# EAGLE board CN-Cape005 (EAGLE 7.2.0)
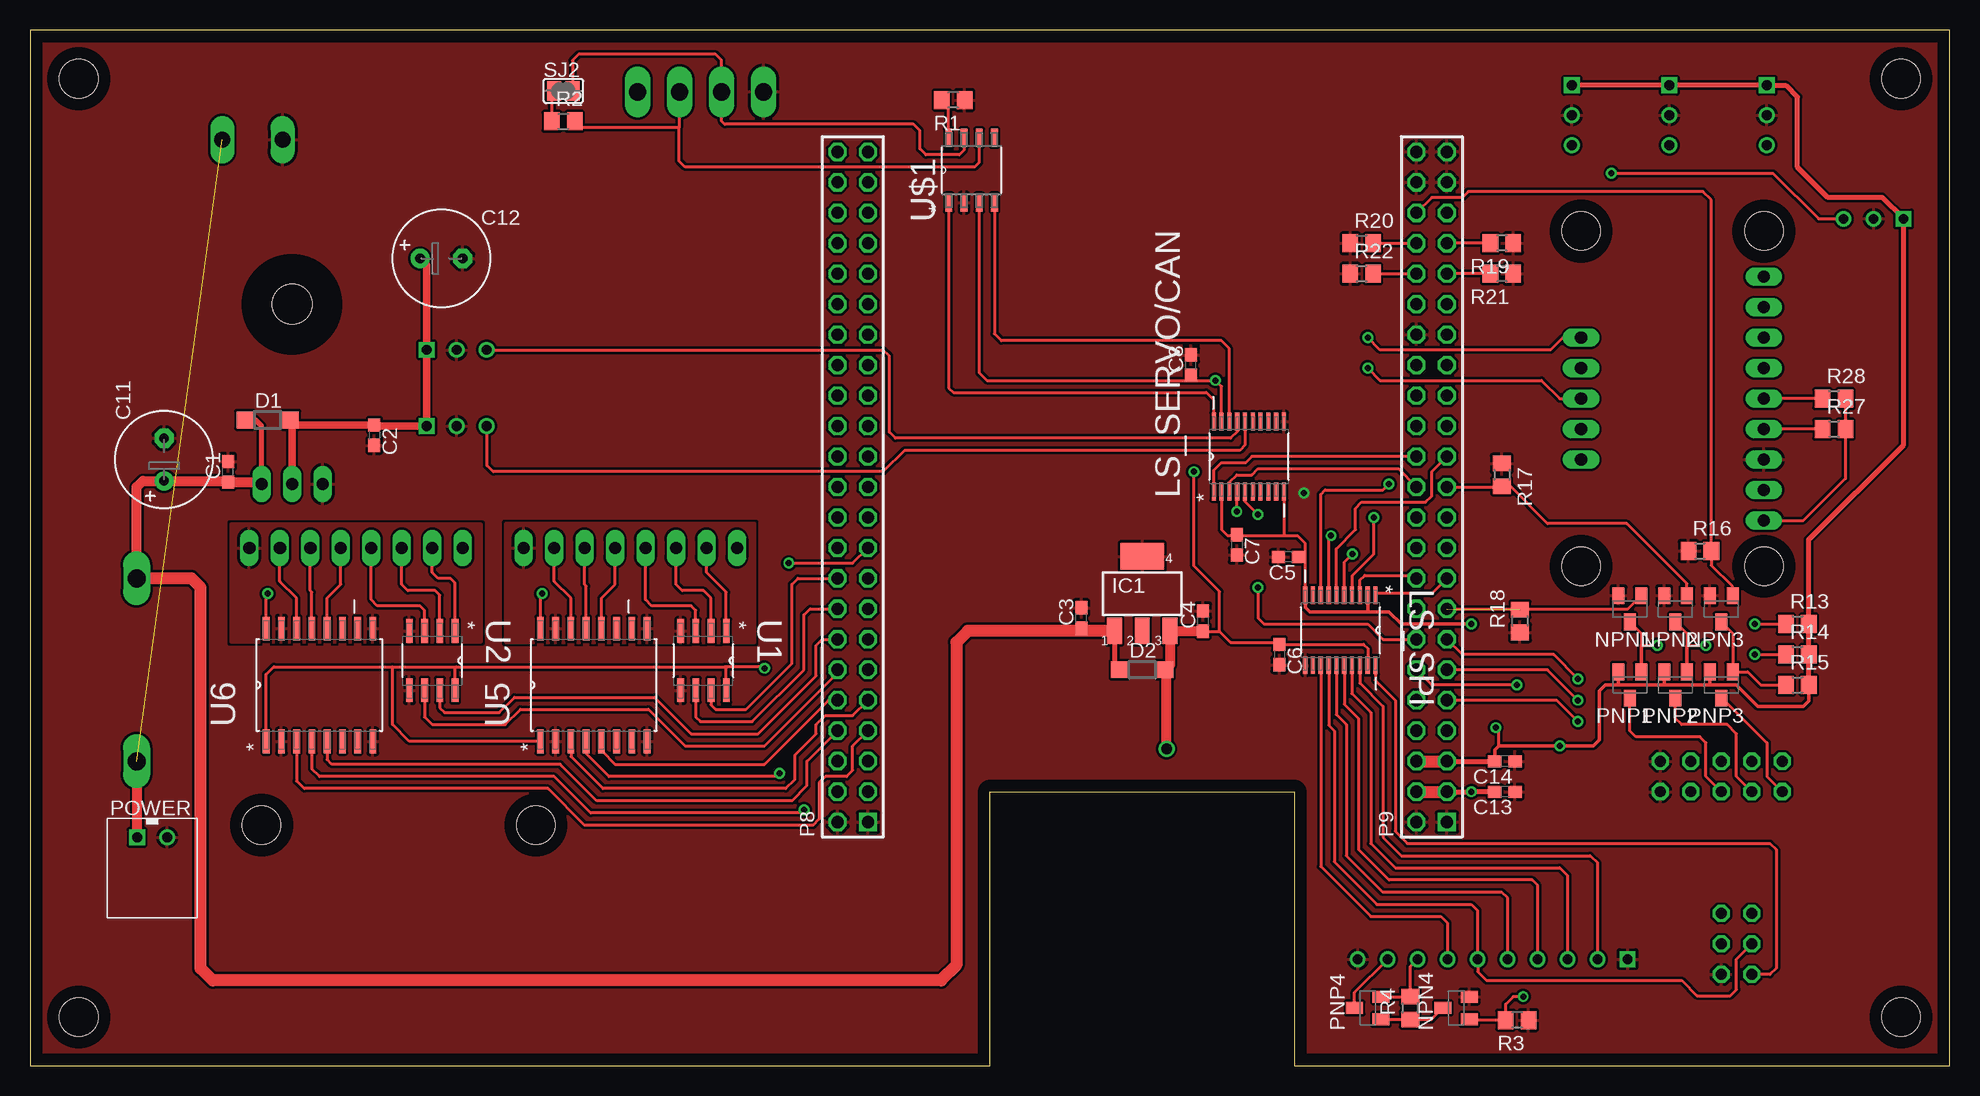
[diagram p0: board, top side]
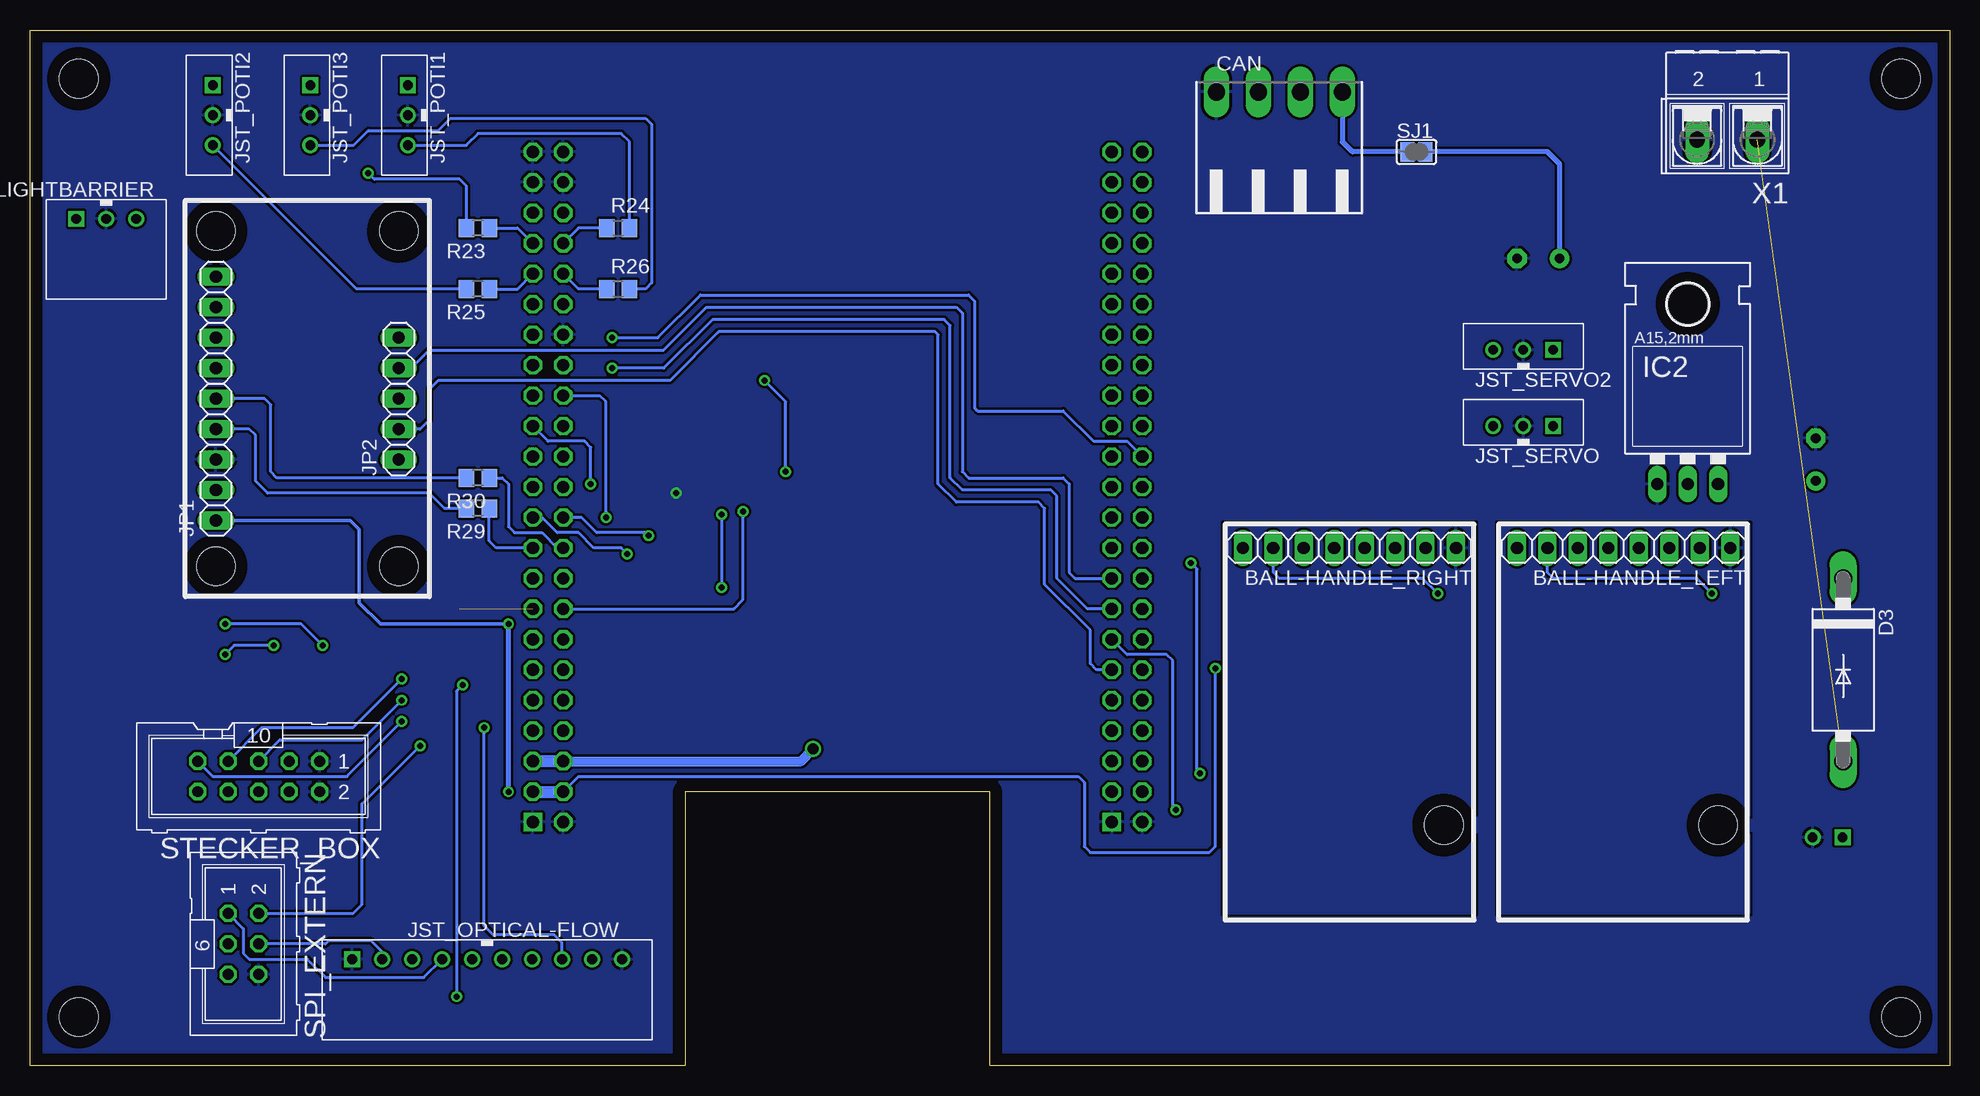
[diagram p1: board, bottom side, seen from below]

Size 160.02 x 86.36 mm. Coordinates in mm from the lower left corner, seen from the top.
Outline: 0,0 80.01,0 80.01,22.86 105.41,22.86 105.41,0 160.02,0 160.02,86.36 0,86.36 0,0
Copper layers (1*16): Top 0.035mm / dielectric 1.5mm / Bottom 0.035mm
Design rules "default *": minimum track width 10mil, minimum drill 24mil, track to track 8mil, track to pad 8mil, pad to pad 8mil, via to via 8mil, smd to smd 8mil, copper to edge 40mil, drill to drill 8mil, minimum pad ring 10mil, minimum via ring 8mil, stop-mask expansion 4mil, vias tented up to drill 0mil, thermal gap 10mil
Holes 3.2 mm at 129.29,69.6 144.53,69.6 129.29,41.66 144.53,41.66 4.06,4.06 155.96,4.06 155.96,82.3 4.06,82.3 19.3,20.07 42.16,20.07

## Footprints (pad centres in the part's own frame; a part is rotated, then mirrored left to right if it is on the bottom)
1X08 = drill 1.016 long: 1 -8.89,0; 2 -6.35,0; 3 -3.81,0; 4 -1.27,0; 5 1.27,0; 6 3.81,0; 7 6.35,0; 8 8.89,0
C0603 = smd 1.1 x 1: 1 -0.85,0; 2 0.85,0
E3,5-8 = drill 0.813 pad 1.6: + -1.778,0 | drill 0.813 pad 1.6 octagon: - 1.778,0
90-4 = drill 1.422 long: 1 -5.25,5.25; 2 -1.75,5.25; 3 1.75,5.25; 4 5.25,5.25
SOD123 = smd 1.4 x 1.4: A 1.9,0; C -1.9,0
DO27-15 = drill 1.499 long: A 7.62,0; C -7.62,0
SOT223 = smd 1.219 x 2.235: 1 -2.311,-3.099; 2 0,-3.099; 3 2.311,-3.099 | smd 3.6 x 2.2: 4 0,3.099
TO220L1 = drill 1.016 long: 1 -2.54,-3.81; 2 0,-3.81; 3 2.54,-3.81 | hole 3.302: 0,11.176
1X09 = drill 1.016 long: 1 -10.16,0; 2 -7.62,0; 3 -5.08,0; 4 -2.54,0; 5 0,0; 6 2.54,0; 7 5.08,0; 8 7.62,0; 9 10.16,0
1X05 = drill 1.016 long: 1 -5.08,0; 2 -2.54,0; 3 0,0; 4 2.54,0; 5 5.08,0
S3B-EH = drill 0.813 square: 1 2.5,0 | drill 0.813: 2 0,0; 3 -2.5,0
S10B-EH = drill 0.813 square: 1 11.25,0 | drill 0.813: 2 8.75,0; 3 6.25,0; 4 3.75,0; 5 1.25,0; 6 -1.25,0; 7 -3.75,0; 8 -6.25,0; 9 -8.75,0; 10 -11.25,0
B3B-EH = drill 0.813 square: 1 2.5,0 | drill 0.813: 2 0,0; 3 -2.5,0
SOP65P640X120-20N = smd 1.473 x 0.356: 1 -2.921,2.921; 2 -2.921,2.286; 3 -2.921,1.626; 4 -2.921,0.965; 5 -2.921,0.33; 6 -2.921,-0.33; 7 -2.921,-0.965; 8 -2.921,-1.626; 9 -2.921,-2.286; 10 -2.921,-2.921; 11 2.921,-2.921; 12 2.921,-2.286; 13 2.921,-1.626; 14 2.921,-0.965; 15 2.921,-0.33; 16 2.921,0.33; 17 2.921,0.965; 18 2.921,1.626; 19 2.921,2.286; 20 2.921,2.921
SOT23-BEC = smd 1 x 1.4: B -0.95,-1.1; C 0,1.1; E 0.95,-1.1
2X23 = drill 1.016 square: 1 -26.67,-1.27 | drill 1.016 octagon: 2 -26.67,1.27; 3 -24.13,-1.27; 4 -24.13,1.27; 5 -21.59,-1.27; 6 -21.59,1.27; 7 -19.05,-1.27; 8 -19.05,1.27; 9 -16.51,-1.27; 10 -16.51,1.27; 11 -13.97,-1.27; 12 -13.97,1.27; 13 -11.43,-1.27; 14 -11.43,1.27; 15 -8.89,-1.27; 16 -8.89,1.27; 17 -6.35,-1.27; 18 -6.35,1.27; 19 -3.81,-1.27; 20 -3.81,1.27; 21 -1.27,-1.27; 22 -1.27,1.27; 23 1.27,-1.27; 24 1.27,1.27; 25 3.81,-1.27; 26 3.81,1.27; 27 6.35,-1.27; 28 6.35,1.27; 29 8.89,-1.27; 30 8.89,1.27; 31 11.43,-1.27; 32 11.43,1.27; 33 13.97,-1.27; 34 13.97,1.27; 35 16.51,-1.27; 36 16.51,1.27; 37 19.05,-1.27; 38 19.05,1.27; 39 21.59,-1.27; 40 21.59,1.27; 41 24.13,-1.27; 42 24.13,1.27; 43 26.67,-1.27; 44 26.67,1.27; 45 29.21,-1.27; 46 29.21,1.27
S2B-EH = drill 0.813 square: 1 2.5,0 | drill 0.813: 2 0,0
R0805 = smd 1.3 x 1.5: 1 -0.95,0; 2 0.95,0
SJ = smd 1.168 x 1.6: 1 -0.762,0; 2 0.762,0
ML6 = drill 0.914 octagon: 1 -2.54,-1.27; 2 -2.54,1.27; 3 0,-1.27; 4 0,1.27; 5 2.54,-1.27; 6 2.54,1.27
ML10 = drill 0.914 octagon: 1 -5.08,-1.27; 2 -5.08,1.27; 3 -2.54,-1.27; 4 -2.54,1.27; 5 0,-1.27; 6 0,1.27; 7 2.54,-1.27; 8 2.54,1.27; 9 5.08,-1.27; 10 5.08,1.27
SOIC127P600X175-8N = smd 1.981 x 0.559: 1 -2.464,1.905; 2 -2.464,0.635; 3 -2.464,-0.635; 4 -2.464,-1.905; 5 2.464,-1.905; 6 2.464,-0.635; 7 2.464,0.635; 8 2.464,1.905
SOIC127P1032X265-16N = smd 1.981 x 0.559: 1 -4.699,4.445; 2 -4.699,3.175; 3 -4.699,1.905; 4 -4.699,0.635; 5 -4.699,-0.635; 6 -4.699,-1.905; 7 -4.699,-3.175; 8 -4.699,-4.445; 9 4.699,-4.445; 10 4.699,-3.175; 11 4.699,-1.905; 12 4.699,-0.635; 13 4.699,0.635; 14 4.699,1.905; 15 4.699,3.175; 16 4.699,4.445
SOIC127P600X175-8N' = smd 1.473 x 0.559: 1 -2.718,1.905; 2 -2.718,0.635; 3 -2.718,-0.635; 4 -2.718,-1.905; 5 2.718,-1.905; 6 2.718,-0.635; 7 2.718,0.635; 8 2.718,1.905
AK500/2-H = drill 1.321 long: 1 -2.515,0; 2 2.515,0

## Placement (x,y rotation side)
BALL-HANDLE_LEFT  [1X08]  27.18,43.18 180 bottom
BALL-HANDLE_RIGHT  [1X08]  50.04,43.18 180 bottom
C1  100nF  [C0603]  16.51,49.53 90 top
C2  100nF  [C0603]  28.7,52.58 270 top
C3  100nF  [C0603]  87.63,37.34 90 top
C4  100nF  [C0603]  97.79,37.08 90 top
C5  100nF  [C0603]  104.9,42.42 180 top
C6  100nF  [C0603]  104.14,34.29 270 top
C7  100nF  [C0603]  100.58,43.43 270 top
C8  100nF  [C0603]  96.77,58.42 90 top
C11  220µF  [E3,5-8]  11.18,50.55 90 top
C12  220µF  [E3,5-8]  34.29,67.31 0 top
C13  100nF  [C0603]  122.94,22.86 180 top
C14  100nF  [C0603]  122.94,25.4 180 top
CAN  [90-4]  55.88,75.95 0 bottom
D1  [SOD123]  19.81,53.85 0 top
D2  [SOD123]  92.71,33.02 0 top
D3  BY550  [DO27-15]  8.89,33.02 270 bottom
IC1  LM340MP-05  [SOT223]  92.71,39.37 0 top
IC2  [TO220L1]  21.84,52.32 0 bottom
JP1  [1X09]  144.53,55.63 90 bottom
JP2  [1X05]  129.29,55.63 90 bottom
JST_LIGHTBARRIER  S3PIN  [S3B-EH]  153.67,70.61 180 bottom
JST_OPTICAL-FLOW  S10PIN  [S10B-EH]  121.92,8.89 180 bottom
JST_POTI1  3PIN  [B3B-EH]  128.52,79.25 90 bottom
JST_POTI2  3PIN  [B3B-EH]  144.78,79.25 90 bottom
JST_POTI3  3PIN  [B3B-EH]  136.65,79.25 90 bottom
JST_SERVO  3PIN  [B3B-EH]  35.56,53.34 0 bottom
JST_SERVO2  3PIN  [B3B-EH]  35.56,59.69 0 bottom
LS_SERVO/CAN  TXB0108PWR  [SOP65P640X120-20N]  101.6,50.8 90 top
LS_SPI  TXB0108PWR  [SOP65P640X120-20N]  109.22,36.32 270 top
NPN1  BC849SMD  [SOT23-BEC]  133.35,38.1 180 top
NPN2  BC849SMD  [SOT23-BEC]  137.16,38.1 180 top
NPN3  BC849SMD  [SOT23-BEC]  140.97,38.1 180 top
NPN4  BC849SMD  [SOT23-BEC]  118.87,4.83 90 top
P8  PINHD-2X23  [2X23]  68.58,46.99 90 top
P9  PINHD-2X23  [2X23]  116.84,46.99 90 top
PNP1  BC858BSMD  [SOT23-BEC]  133.35,31.75 180 top
PNP2  BC858BSMD  [SOT23-BEC]  137.16,31.75 180 top
PNP3  BC858BSMD  [SOT23-BEC]  140.97,31.75 180 top
PNP4  BC858BSMD  [SOT23-BEC]  111.51,4.83 90 top
POWER  S2PIN  [S2B-EH]  11.43,19.05 180 top
R1  1k  [R0805]  76.96,80.52 180 top
R2  120  [R0805]  44.45,78.74 0 top
R3  10k  [R0805]  123.95,3.81 180 top
R4  10k  [R0805]  115.06,4.83 90 top
R13  10k  [R0805]  147.32,36.83 0 top
R14  10k  [R0805]  147.32,34.29 0 top
R15  10k  [R0805]  147.32,31.75 0 top
R16  10k  [R0805]  139.19,42.93 0 top
R17  10k  [R0805]  122.68,49.28 270 top
R18  10k  [R0805]  124.21,37.08 90 top
R19  1k  [R0805]  122.68,68.58 180 top
R20  1k  [R0805]  111,68.58 0 top
R21  1k  [R0805]  122.68,66.04 180 top
R22  1k  [R0805]  111,66.04 0 top
R23  1,8k  [R0805]  122.68,69.85 180 bottom
R24  1,8k  [R0805]  111,69.85 0 bottom
R25  1,8k  [R0805]  122.68,64.77 180 bottom
R26  1,8k  [R0805]  111,64.77 0 bottom
R27  10k  [R0805]  150.37,53.09 0 top
R28  10k  [R0805]  150.37,55.63 0 top
R29  330  [R0805]  122.68,46.48 180 bottom
R30  330  [R0805]  122.68,49.02 180 bottom
SJ1  [SJ]  44.45,76.2 0 bottom
SJ2  [SJ]  44.45,81.28 0 top
SPI_EXTERN  [ML6]  142.24,10.16 270 bottom
STECKER_BOX  [ML10]  140.97,24.13 180 bottom
U1  ADUM1200ARZ  [SOIC127P600X175-8N]  56.13,33.78 270 top
U2  ADUM1200ARZ  [SOIC127P600X175-8N]  33.53,33.78 270 top
U5  ADUM1300ARWZ  [SOIC127P1032X265-16N]  46.99,31.75 90 top
U6  ADUM1300ARWZ  [SOIC127P1032X265-16N]  24.13,31.75 90 top
U$1  MCP2551-I/SN  [SOIC127P600X175-8N']  78.49,74.68 90 top
X1  [AK500/2-H]  18.54,77.22 180 bottom

## Library data of the parts
BALL-HANDLE_LEFT BALL-HANDLE_RIGHT JP1 JP2 = pinhead
C1-C8 C11-C14 R1-R4 R13-R30 = rcl
CAN = con-weidmueller-sl35
D1 D2 = diode; REICHELT: SD 101BW
D3 = diode
IC1 = linear
IC2 = v-reg
JST_LIGHTBARRIER JST_OPTICAL-FLOW JST_POTI1-JST_POTI3 JST_SERVO JST_SERVO2 POWER = jst_eh
LS_SERVO/CAN LS_SPI = TI-TXB0108PWR; MPN: TXB0108PWR; OC_FARNELL: 1494945; OC_NEWARK: 27M1151; PACKAGE: TSSOP-20; SUPPLIER: Texas Instruments
NPN1-NPN4 = transistor-npn
P8 P9 = pinhead-2x23
PNP1-PNP4 = transistor-pnp
SJ1 SJ2 = jumper
SPI_EXTERN STECKER_BOX = con-ml
U1 U2 = ADUM1200; MPN: ADUM1200ARZ; OC_FARNELL: 1078204; OC_NEWARK: 19M0750; PACKAGE: SOIC-8; SUPPLIER: Analog Devices
U5 U6 = ADUM1300; MPN: ADUM1300ARWZ; OC_FARNELL: 1226209; OC_NEWARK: 19M8751; PACKAGE: SOIC-16; SUPPLIER: Analog Devices
U$1 = Microchip-MCP2551-I_SN; MPN: MCP2551-I/SN; OC_FARNELL: 9758569; OC_NEWARK: 69K7604; PACKAGE: SOIC-8; SUPPLIER: Microchip
X1 = con-ptr500

## Nets
5V/2_F&J: CAN.4 SJ1.1
!BH_L_RESET: BALL-HANDLE_LEFT.4 U6.12
!BH_L_RESET_3V: P8.8 U6.5
!BH_R_RESET: BALL-HANDLE_RIGHT.4 U5.12
!BH_R_RESET_3V: P8.10 U5.5
+3V3: C5.1 C7.1 C13.2 JP1.1 LS_SERVO/CAN.2 LS_SERVO/CAN.10 LS_SPI.2 LS_SPI.10 P9.3 P9.4 R27.2 R28.2 U1.8 U2.8 U5.1 U6.1
+5V/1: C4.1 C6.1 C8.1 C14.2 D2.A IC1.3 JST_LIGHTBARRIER.1 JST_OPTICAL-FLOW.8 JST_POTI1.1 JST_POTI2.1 JST_POTI3.1 LS_SERVO/CAN.19 LS_SPI.19 P9.5 P9.6 PNP1.E PNP2.E PNP3.E PNP4.E R4.2 R13.2 R14.2 R15.2 SPI_EXTERN.2 U$1.3
+5V/2: C2.1 C12.+ D1.A IC2.2 JST_SERVO2.1 JST_SERVO.1 SJ1.2
+5V/3: BALL-HANDLE_RIGHT.7 U1.1 U5.16
+5V/4: BALL-HANDLE_LEFT.7 U2.1 U6.16
+10V: C1.1 C3.1 C11.+ D1.C D2.C D3.C IC1.1 IC2.3
+12V: D3.A POWER.1 X1.1
ADC0_1.8V: P9.39 R19.2 R23.1
ADC1: JST_POTI1.3 R24.2
ADC1_1.8V: P9.40 R20.2 R24.1
ADC2: JST_POTI2.3 R25.2
ADC2_1.8V: P9.37 R21.2 R25.1
ADC3: JST_POTI3.3 R26.2
ADC3_1.8V: P9.38 R22.2 R26.1
BH_L_DIR: BALL-HANDLE_LEFT.2 U6.14
BH_L_DIR_3V: P8.7 U6.3
BH_L_FF1: BALL-HANDLE_LEFT.5 U2.3
BH_L_FF1_3V: P8.12 U2.6
BH_L_FF2: BALL-HANDLE_LEFT.6 U2.2
BH_L_FF2_3V: P8.14 U2.7
BH_L_PWM: BALL-HANDLE_LEFT.3 U6.13
BH_L_PWM_3V: P8.13 U6.4
BH_R_DIR: BALL-HANDLE_RIGHT.2 U5.14
BH_R_DIR_3V: P8.9 U5.3
BH_R_FF1: BALL-HANDLE_RIGHT.5 U1.3
BH_R_FF1_3V: P8.16 U1.6
BH_R_FF2: BALL-HANDLE_RIGHT.6 U1.2
BH_R_FF2_3V: P8.18 U1.7
BH_R_PWM: BALL-HANDLE_RIGHT.3 U5.13
BH_R_PWM_3V: P8.19 U5.4
CAN_RX: LS_SERVO/CAN.18 U$1.4
CAN_RX_3V: LS_SERVO/CAN.3 P9.24
CAN_TX: LS_SERVO/CAN.20 U$1.1
CAN_TX_3V: LS_SERVO/CAN.1 P9.26
CANH: CAN.2 SJ2.2 U$1.7
CANL: CAN.3 R2.2 U$1.6
DEN: JP2.1
DRDY: JP2.3 P8.15
GND: C1.2 C2.2 C3.2 C4.2 C5.2 C6.2 C7.2 C8.2 C11.- C12.- C13.1 C14.1 CAN.1 IC1.4 IC2.1 JP1.3 JST_LIGHTBARRIER.2 JST_OPTICAL-FLOW.1 JST_OPTICAL-FLOW.10 JST_POTI1.2 JST_POTI2.2 JST_POTI3.2 JST_SERVO2.2 JST_SERVO.2 LS_SERVO/CAN.11 LS_SPI.11 NPN1.E NPN2.E NPN3.E NPN4.E P8.1 P8.2 P9.1 P9.2 P9.34 P9.43 P9.44 P9.45 P9.46 POWER.2 R1.1 R3.1 R16.1 R17.1 R18.1 R19.1 R20.1 R21.1 R22.1 SPI_EXTERN.6 STECKER_BOX.1 STECKER_BOX.2 U1.5 U2.5 U5.2 U5.8 U6.2 U6.8 U$1.2 X1.2
GND3: BALL-HANDLE_RIGHT.1 U1.4 U5.9 U5.15
GND4: BALL-HANDLE_LEFT.1 U2.4 U6.9 U6.15
I2C2_SCL: P9.19 R29.1
I2C2_SDA: P9.20 R30.1
INT1: JP2.4 P8.17
INT2: JP2.5 P8.26
INTG: JP2.2 P8.11
LB_ADC: JST_LIGHTBARRIER.3 R23.2
N$1: NPN1.C PNP1.B R13.1
N$2: NPN2.C PNP2.B R14.1
N$3: NPN4.C PNP4.B R4.1
N$4: NPN3.C PNP3.B R15.1
N$5: P9.41
N$9: R1.2 U$1.8
N$10: R2.1 SJ2.1
OF_LED: JST_OPTICAL-FLOW.9 PNP4.C
OF_LED_3V: NPN4.B P9.12 R3.2
OF_NCS: JST_OPTICAL-FLOW.3 LS_SPI.17
OF_NCS_3V: LS_SPI.4 P9.30
OF_NPD: JST_OPTICAL-FLOW.5 LS_SPI.15
OF_NPD_3V: LS_SPI.6 P9.25
OF_RST: JST_OPTICAL-FLOW.7 LS_SPI.13
OF_RST_3V: LS_SPI.8 P9.27
SCL: JP1.4 R27.1 R29.2
SDA: JP1.5 R28.1 R30.2
SERVO_PWM: JST_SERVO.3 LS_SERVO/CAN.16
SERVO_PWM2: JST_SERVO2.3 LS_SERVO/CAN.17
SERVO_PWM2_3V: LS_SERVO/CAN.4 P9.16
SERVO_PWM_3V: LS_SERVO/CAN.5 P9.14
SPI0_CLK: LS_SPI.7 P9.22
SPI0_CS: LS_SPI.1 P9.17
SPI0_D0_MISO: LS_SPI.5 P9.21
SPI0_D1_MOSI: LS_SPI.3 P9.18
SPI_CLK: JST_OPTICAL-FLOW.6 LS_SPI.14 SPI_EXTERN.3
SPI_CS: LS_SPI.20 SPI_EXTERN.5
SPI_MISO: JST_OPTICAL-FLOW.4 LS_SPI.16 SPI_EXTERN.1
SPI_MOSI: JST_OPTICAL-FLOW.2 LS_SPI.18 SPI_EXTERN.4
SW_BUNDLE-LED: PNP2.C STECKER_BOX.8
SW_BUNDLE-LED_3V: NPN2.B P9.23 R17.2
SW_BUNDLE_3V: P9.13 STECKER_BOX.7
SW_POWER-LED: PNP3.C STECKER_BOX.10
SW_POWER-LED_3V: NPN3.B P9.42 R16.2
SW_PWR_BUT: P9.9 STECKER_BOX.9
SW_VISION-LED: PNP1.C STECKER_BOX.6
SW_VISION-LED_3V: NPN1.B P9.15 R18.2
SW_VISION_3V: P9.11 STECKER_BOX.5

## Tracks (layer width: path | path; a pad name or v marks a point on that pad's centre or on a via)
5V/2_F&J
  Bottom 0.406: SJ1.1 49.78,76.2 50.63,77.05 CAN.4
!BH_L_RESET
  Top 0.254: U6.12 24.77,38.99 25.91,40.13 BALL-HANDLE_LEFT.4
!BH_L_RESET_3V
  Top 0.254: P8.8 64.77,25.4 64.77,23.37 63.5,22.1 47.24,22.1 44.2,25.15 25.15,25.15 24.77,25.53 U6.5
!BH_R_RESET
  Top 0.254: U5.12 47.62,38.99 48.77,40.13 BALL-HANDLE_RIGHT.4
!BH_R_RESET_3V
  Top 0.254: P8.10 66.55,30.48 61.21,25.15 48.77,25.15 47.62,26.29 U5.5
+3V3  (via drill 0.5)
  Top 0.254: U6.1 19.68,32.64 20.32,33.27 30.23,33.27 | 30.23,33.27 35.56,33.27 | 35.56,33.27 57.91,33.27 | U1.8 58.04,33.15 57.91,33.27 | U2.8 35.43,33.15 35.56,33.27 | U5.1 31.62,27.05 30.23,28.45 30.23,33.27 | LS_SERVO/CAN.2 99.31,44.7 99.82,44.2 100.58,44.2 | 100.58,44.2 104.65,44.2 | 104.65,44.2 105.66,44.2 106.3,43.56 106.3,42.42 | LS_SPI.10 106.3,42.42 | LS_SERVO/CAN.10 104.52,44.32 104.65,44.2 | C7.1 100.58,44.2 | C5.1 106.3,42.42 | v61.21,33.15 61.21,33.27 57.91,33.27 | JP1.1 147.83,45.47 151.32,48.96 R27.2 R28.2
  Top 0.305: v120.14,36.83 114.3,36.83 113.28,37.85 111.51,37.85 | 111.51,37.85 106.68,37.85 106.3,38.23 LS_SPI.10 | LS_SPI.2 111.51,37.85
  Top 0.406: P9.3 v120.14,22.86 C13.2
  Top 1.016: P9.4 P9.3
  Bottom 0.254: P9.4 114.3,24.13 72.64,24.13 72.14,23.62 72.14,18.29 71.63,17.78 61.72,17.78 61.21,18.29 v61.21,33.15
  Bottom 0.305: v120.14,36.83 130.81,36.83 132.59,38.61 132.59,44.7 133.35,45.47 JP1.1
  Bottom 0.406: v120.14,22.86 v120.14,36.83
  Bottom 1.016: P9.3 P9.4
+5V/1  (via drill 0.5, 0.9)
  Top 0.254: U$1.3 79.12,57.78 79.76,57.15 97.03,57.15 | 97.03,57.15 v98.81,57.15 99.31,56.64 LS_SERVO/CAN.19 | C4.1 99.15,36.23 | 99.15,36.23 100.08,35.31 103.97,35.31 C6.1 111.16,35.14 111.51,34.8 LS_SPI.19 | JST_OPTICAL-FLOW.8 115.06,8.28 R4.2 PNP4.E | C8.1 96.77,57.4 97.03,57.15 | 99.15,36.23 99.15,39.54 97.03,41.66 v97.03,49.53 | 122.43,26.67 122.43,27.94 v122.17,28.19
  Top 0.305: C14.2 122.09,26.33 122.43,26.67 v127.51,26.67 130.3,26.67 130.81,27.18 130.81,31.24 131.32,31.75 132.33,31.75 | 132.33,31.75 136.14,31.75 | 136.14,31.75 139.95,31.75 | 139.95,31.75 142.24,31.75 144.02,29.97 147.83,29.97 148.27,30.41 R15.2 | PNP1.E 132.4,31.82 132.33,31.75 | PNP2.E 136.21,31.82 136.14,31.75 | PNP3.E 140.02,31.82 139.95,31.75
  Top 0.406: P9.5 C14.2 | R15.2 R14.2 R13.2 148.27,43.88 156.17,51.78 JST_LIGHTBARRIER.1 154.39,72.39 149.86,72.39 147.32,74.93 147.32,80.77 146.34,81.75 JST_POTI2.1 JST_POTI3.1 JST_POTI1.1
  Top 0.813: v94.74,26.42 94.74,32.89 D2.A 95.02,33.43 IC1.3 97.75,36.27 C4.1
  Top 1.016: P9.6 P9.5
  Bottom 0.254: v97.03,49.53 97.03,55.37 v98.81,57.15 | SPI_EXTERN.2 133.1,12.7 132.33,13.46 132.33,21.84 v127.51,26.67 | JST_OPTICAL-FLOW.8 115.67,10.26 116.33,10.92 121.41,10.92 122.17,11.68 v122.17,28.19
  Bottom 0.813: P9.6 95.76,25.4 v94.74,26.42
  Bottom 1.016: P9.6 P9.5
+5V/2
  Top 0.61: C12.+ 33.06,66.76 JST_SERVO2.1 JST_SERVO.1 28.79,53.34 C2.1 21.93,53.43 21.84,53.34 | IC2.2 21.84,53.34 | 21.84,53.34 21.84,53.72 D1.A
  Bottom 0.406: C12.+ 32.51,75.18 33.53,76.2 SJ1.2
+5V/3  (via drill 0.5)
  Top 0.254: U1.1 58.04,39.5 56.39,41.15 BALL-HANDLE_RIGHT.7 | U5.16 42.55,39.24 v42.67,39.37
  Bottom 0.254: v42.67,39.37 43.94,40.64 55.88,40.64 56.39,41.15 BALL-HANDLE_RIGHT.7
+5V/4  (via drill 0.5)
  Top 0.254: U2.1 35.43,40.26 35.05,40.64 34.04,40.64 33.53,41.15 BALL-HANDLE_LEFT.7 | U6.16 19.68,39.24 v19.81,39.37
  Bottom 0.254: v19.81,39.37 21.08,40.64 33.02,40.64 33.53,41.15 BALL-HANDLE_LEFT.7
+10V
  Top 0.406: IC2.3 19.3,53.34 18.8,53.85 D1.C | IC1.1 90.4,33.43 D2.C
  Top 0.813: D3.C 8.89,48.26 9.4,48.77 C11.+ 16.42,48.77 C1.1 19.14,48.68 IC2.3
  Top 1.016: D3.C 13.46,40.64 14.22,39.88 14.22,8.13 15.24,7.11 75.95,7.11 77.22,8.38 77.22,35.31 78.18,36.27 IC1.1 87.85,36.27 C3.1
+12V  (1 unrouted)
  Top 0.813: POWER.1 8.93,25.36 D3.A
ADC0_1.8V
  Top 0.254: R19.2 P9.39
  Bottom 0.254: R23.1 119.38,69.85 P9.39
ADC1
  Bottom 0.254: R24.2 110.05,77.03 110.74,77.72 122.68,77.72 123.66,76.75 JST_POTI1.3
ADC1_1.8V
  Top 0.254: R20.2 P9.40
  Bottom 0.254: R24.1 114.3,69.85 P9.40
ADC2
  Bottom 0.254: R25.2 132.8,64.77 JST_POTI2.3
ADC2_1.8V
  Top 0.254: R21.2 P9.37
  Bottom 0.254: R25.1 119.38,64.77 P9.37
ADC3
  Bottom 0.254: JST_POTI3.3 133.06,76.75 131.83,77.98 125.98,77.98 124.97,78.99 108.71,78.99 108.2,78.49 108.2,65.28 108.71,64.77 R26.2
ADC3_1.8V
  Top 0.254: R22.2 P9.38
  Bottom 0.254: R26.1 114.3,64.77 P9.38
BH_L_DIR
  Top 0.254: U6.14 22.23,38.99 20.83,40.39 BALL-HANDLE_LEFT.2
BH_L_DIR_3V
  Top 0.254: P8.7 68.58,26.67 68.58,24.64 68.07,24.13 66.29,24.13 65.79,23.62 65.79,20.57 65.28,20.07 46.23,20.07 43.18,23.11 22.86,23.11 22.23,23.75 U6.3
BH_L_FF1
  Top 0.254: U2.3 32.89,37.97 32.51,38.35 28.96,38.35 28.45,38.86 BALL-HANDLE_LEFT.5
BH_L_FF1_3V
  Top 0.254: U2.6 32.89,29.08 33.53,28.45 39.62,28.45 40.89,29.72 51.56,29.72 54.61,26.67 61.21,26.67 67.31,32.77 P8.12
BH_L_FF2
  Top 0.254: U2.2 34.16,39.24 33.78,39.62 31.5,39.62 30.99,40.13 BALL-HANDLE_LEFT.6
BH_L_FF2_3V
  Top 0.254: U2.7 34.16,29.84 34.54,29.46 39.12,29.46 40.39,30.73 52.07,30.73 55.12,27.69 60.71,27.69 65.53,32.51 65.53,35.05 66.04,35.56 P8.14
BH_L_PWM
  Top 0.254: U6.13 23.5,39.5 23.37,39.62 BALL-HANDLE_LEFT.3
BH_L_PWM_3V  (via drill 0.5)
  Top 0.254: v64.52,21.34 64.26,21.08 46.74,21.08 43.69,24.13 24.13,24.13 23.5,24.77 U6.4
  Bottom 0.254: v64.52,21.34 64.77,21.59 64.77,33.78 65.28,34.29 68.58,34.29 P8.13
BH_R_DIR
  Top 0.254: U5.14 45.09,38.99 43.69,40.39 BALL-HANDLE_RIGHT.2
BH_R_DIR_3V
  Top 0.254: P8.9 68.58,29.21 66.29,29.21 65.53,28.45 65.53,27.69 63.75,25.91 63.75,23.88 62.99,23.11 47.75,23.11 45.09,25.78 U5.3
BH_R_FF1
  Top 0.254: U1.3 55.5,37.97 55.12,38.35 51.82,38.35 51.31,38.86 BALL-HANDLE_RIGHT.5
BH_R_FF1_3V
  Top 0.254: U1.6 55.5,29.08 55.88,28.7 60.2,28.7 64.52,33.02 64.52,37.59 65.02,38.1 P8.16
BH_R_FF2
  Top 0.254: U1.2 56.77,38.99 56.13,39.62 54.36,39.62 53.85,40.13 BALL-HANDLE_RIGHT.6
BH_R_FF2_3V
  Top 0.254: U1.7 56.77,30.1 57.15,29.72 59.69,29.72 63.5,33.53 63.5,40.13 64.01,40.64 P8.18
BH_R_PWM
  Top 0.254: U5.13 46.35,40.01 46.23,40.13 BALL-HANDLE_RIGHT.3
BH_R_PWM_3V  (via drill 0.5)
  Top 0.254: v62.48,24.38 62.23,24.13 48.26,24.13 46.35,26.04 U5.4 | v63.25,41.91 68.58,41.91 P8.19
  Bottom 0.254: v62.48,24.38 62.74,24.64 62.74,41.4 v63.25,41.91
CAN_RX
  Top 0.254: LS_SERVO/CAN.18 99.97,59.79 99.31,60.45 80.97,60.45 80.39,61.04 U$1.4
CAN_RX_3V
  Top 0.254: P9.24 114.05,49.78 102.36,49.78 101.85,49.28 100.58,49.28 99.97,48.67 LS_SERVO/CAN.3
CAN_TX
  Top 0.254: LS_SERVO/CAN.20 98.68,55.5 98.17,56.01 98.04,56.13 76.96,56.13 76.58,56.52 U$1.1
CAN_TX_3V
  Top 0.254: P9.26 101.85,50.8 101.35,50.29 99.31,50.29 98.68,49.66 LS_SERVO/CAN.1
CANH
  Top 0.254: U$1.7 77.85,76.33 77.47,75.95 74.68,75.95 74.17,76.45 74.17,77.98 73.66,78.49 57.91,78.49 57.66,78.74 57.66,81.42 CAN.2 57.63,83.85 57.15,84.33 45.72,84.33 45.21,83.82 SJ2.2
CANL
  Top 0.254: U$1.6 79.12,75.31 78.74,74.93 54.61,74.93 54.1,75.44 54.1,78.23 | CAN.3 54.1,81.42 54.1,78.23 | 54.1,78.23 45.91,78.23 R2.2
DRDY  (via drill 0.5)
  Top 0.254: v111.51,58.17 112.52,57.15 125.98,57.15 127.51,55.63 JP2.3
  Bottom 0.254: P8.15 71.88,38.1 74.42,40.64 74.42,47.5 74.93,48.01 82.3,48.01 83.31,49.02 83.31,61.72 83.82,62.23 103.12,62.23 107.19,58.17 v111.51,58.17
GND  (via drill 0.5)
  other vias: 106.17,47.75
  pour Bottom (rank 6): 0,86.36 160.02,86.36 160.02,0 0,0
  pour Top (rank 6): 0,86.36 160.02,86.36 160.02,0 0,0
GND3
  pour Top: 39.62,45.21 39.62,35.31 60.45,35.31 60.45,45.21
  pour Bottom: 39.62,45.21 39.62,12.7 60.45,12.7 60.45,45.21
GND4
  pour Top: 16.76,45.21 37.59,45.21 37.59,35.31 16.76,35.31
  pour Bottom: 16.76,45.21 16.76,12.7 37.59,12.7 37.59,45.21
I2C2_SCL
  Bottom 0.254: P9.19 121.16,43.18 121.73,43.75 R29.1
I2C2_SDA
  Bottom 0.254: R30.1 120.65,49.02 120.14,48.51 120.14,44.96 119.63,44.45 117.35,44.45 116.08,43.18 P9.20
INT1
  Bottom 0.254: P8.17 72.9,40.64 73.41,41.15 73.41,48.51 73.91,49.02 81.79,49.02 82.3,49.53 82.3,62.74 82.8,63.25 103.63,63.25 107.19,59.69 126.75,59.69 128.27,58.17 JP2.4
INT2  (via drill 0.5)
  Top 0.254: v111.51,60.71 112.52,59.69 126.75,59.69 127.76,60.71 JP2.5
  Bottom 0.254: v111.51,60.71 107.7,60.71 104.14,64.26 81.79,64.26 81.28,63.75 81.28,54.86 81.03,54.61 73.91,54.61 71.37,52.07 68.58,52.07 P8.26
INTG
  Bottom 0.254: P8.11 71.12,33.02 71.63,33.53 71.63,36.32 75.44,40.13 75.44,46.48 75.95,46.99 82.8,46.99 84.33,48.51 84.33,60.96 84.58,61.21 102.62,61.21 106.68,57.15 125.98,57.15 126.75,56.39 126.75,53.85 127.51,53.09 JP2.2
LB_ADC  (via drill 0.5)
  Top 0.254: v131.83,74.42 145.29,74.42 149.1,70.61 JST_LIGHTBARRIER.3
  Bottom 0.254: R23.2 123.63,73.34 124.21,73.91 131.32,73.91 v131.83,74.42
N$1  (via drill 0.5)
  Top 0.254: NPN1.C 134.3,36.05 PNP1.B 134.3,35.05 v135.64,35.05 | v143.76,36.83 R13.1
  Bottom 0.254: v135.64,35.05 137.41,36.83 v143.76,36.83
N$2  (via drill 0.5)
  Top 0.254: NPN2.C 138.11,36.05 PNP2.B 138.11,35.05 v139.7,35.05 | v143.76,34.29 R14.1
  Bottom 0.254: v139.7,35.05 143,35.05 v143.76,34.29
N$3
  Top 0.254: PNP4.B R4.1 116.82,3.88 NPN4.C
N$4
  Top 0.254: NPN3.C 141.92,36.05 PNP3.B 143.17,32.85 144.27,31.75 R15.1
N$9
  Top 0.254: U$1.8 76.58,79.95 R1.2
N$10
  Top 0.254: R2.1 43.5,81.09 SJ2.1
OF_LED
  Top 0.254: PNP4.C 110.41,6.13 JST_OPTICAL-FLOW.9
OF_LED_3V  (via drill 0.5)
  Top 0.254: v124.46,5.78 123.63,5.78 123,5.15 R3.2 120.04,3.81 NPN4.B | v123.95,31.75 116.84,31.75 P9.12
  Bottom 0.254: v124.46,5.78 124.46,31.24 v123.95,31.75
OF_NCS
  Top 0.254: LS_SPI.17 110.19,31.04 111.76,29.46 111.76,18.54 113.79,16.51 127.51,16.51 128.17,15.85 JST_OPTICAL-FLOW.3
OF_NCS_3V  (via drill 0.5)
  Top 0.254: LS_SPI.4 110.24,39.29 110.24,40.89 112.01,42.67 v112.01,45.72
  Bottom 0.254: P9.30 112.52,55.88 112.01,55.37 v112.01,45.72
OF_NPD
  Top 0.254: LS_SPI.15 108.89,29.29 109.73,28.45 109.73,17.53 112.78,14.48 122.68,14.48 123.17,13.99 JST_OPTICAL-FLOW.5
OF_NPD_3V
  Top 0.254: P9.25 116.84,49.53 116.84,47.5 116.33,46.99 111,46.99 110.49,46.48 110.49,44.7 108.89,43.1 LS_SPI.6
OF_RST
  Top 0.254: LS_SPI.13 107.59,16.61 111.76,12.45 117.6,12.45 118.17,11.88 JST_OPTICAL-FLOW.7
OF_RST_3V  (via drill 0.5)
  Top 0.254: v113.28,48.51 112.78,48.01 107.95,48.01 107.59,47.65 LS_SPI.8
  Bottom 0.254: v113.28,48.51 113.28,51.56 113.79,52.07 116.84,52.07 P9.27
SCL
  Top 0.254: R27.1 JP1.4
  Bottom 0.254: R29.2 125.48,46.48 126.75,47.75 140.21,47.75 141.22,48.77 141.22,52.58 141.73,53.09 JP1.4
SDA
  Top 0.254: R28.1 JP1.5
  Bottom 0.254: R30.2 139.45,49.02 139.95,49.53 139.95,55.12 140.46,55.63 JP1.5
SERVO_PWM
  Top 0.254: LS_SERVO/CAN.16 101.27,51.74 100.84,51.31 72.9,51.31 71.12,49.53 38.61,49.53 38.1,50.04 38.1,53.3 JST_SERVO.3
SERVO_PWM2
  Top 0.254: JST_SERVO2.3 71.12,59.69 71.63,59.18 71.63,52.83 72.14,52.32 100.08,52.32 100.64,52.88 LS_SERVO/CAN.17
SERVO_PWM2_3V  (via drill 0.5)
  Top 0.254: v100.58,46.23 100.58,47.83 LS_SERVO/CAN.4
  Bottom 0.254: P9.16 101.35,38.1 100.58,38.86 v100.58,46.23
SERVO_PWM_3V  (via drill 0.5)
  Top 0.254: LS_SERVO/CAN.5 101.27,47.07 v102.36,45.97 | v102.36,39.88 102.36,37.34 102.87,36.83 111.51,36.83 112.78,35.56 P9.14
  Bottom 0.254: v102.36,45.97 v102.36,39.88
SPI0_CLK  (via drill 0.5)
  Top 0.254: LS_SPI.7 108.25,43.99 v108.46,44.2
  Bottom 0.254: P9.22 114.05,45.72 112.78,44.45 108.71,44.45 v108.46,44.2
SPI0_CS
  Top 0.254: P9.17 116.84,39.37 112.27,39.37 LS_SPI.1
SPI0_D0_MISO  (via drill 0.5)
  Top 0.254: LS_SPI.5 109.55,41.99 v110.24,42.67
  Bottom 0.254: P9.21 117.35,45.72 116.08,44.45 114.3,44.45 113.03,43.18 110.74,43.18 v110.24,42.67
SPI0_D1_MOSI
  Top 0.254: LS_SPI.3 110.85,40.49 111.25,40.89 115.32,40.89 P9.18
SPI_CLK
  Top 0.254: LS_SPI.14 108.25,28.4 108.71,27.94 108.71,17.02 112.27,13.46 120.14,13.46 120.67,12.93 JST_OPTICAL-FLOW.6 120.67,7.85 121.41,7.11 137.67,7.11 138.94,5.84 141.73,5.84 142.24,6.35 142.24,8.89 SPI_EXTERN.3
SPI_CS
  Top 0.254: LS_SPI.20 112.14,32.13 113.79,30.48 113.79,19.56 114.81,18.54 145.03,18.54 145.54,18.03 145.54,8.13 145.03,7.62 SPI_EXTERN.5
SPI_MISO
  Top 0.254: LS_SPI.16 109.55,30.15 110.74,28.96 110.74,18.03 113.28,15.49 125.22,15.49 125.67,15.05 JST_OPTICAL-FLOW.4
  Bottom 0.254: SPI_EXTERN.1 142.24,11.43 142.24,9.4 141.73,8.89 136.91,8.89 135.38,7.37 127.19,7.37 JST_OPTICAL-FLOW.4
SPI_MOSI
  Top 0.254: LS_SPI.18 110.85,31.9 112.78,29.97 112.78,19.05 114.3,17.53 130.05,17.53 130.67,16.9 JST_OPTICAL-FLOW.2
  Bottom 0.254: JST_OPTICAL-FLOW.2 130.67,9.51 131.57,10.41 135.13,10.41 135.38,10.16 SPI_EXTERN.4
SW_BUNDLE-LED
  Top 0.254: STECKER_BOX.8 142.24,24.13 142.24,27.69 141.48,28.45 137.67,28.45 137.16,28.96 PNP2.C
SW_BUNDLE-LED_3V
  Top 0.254: NPN2.B 138.11,40.2 133.1,45.21 126.49,45.21 123.38,48.33 R17.2 122.62,48.26 P9.23
SW_BUNDLE_3V  (via drill 0.5)
  Top 0.254: v129.03,32.26 127,34.29 119.38,34.29 P9.13
  Bottom 0.254: STECKER_BOX.7 140.72,28.19 133.1,28.19 v129.03,32.26
SW_POWER-LED
  Top 0.254: PNP3.C 141.05,30.65 144.78,26.92 144.78,24.13 STECKER_BOX.10
SW_POWER-LED_3V
  Top 0.254: NPN3.B 141.92,39.94 140.14,41.72 R16.2 140.14,72.2 139.45,72.9 119.89,72.9 119.38,72.39 116.84,72.39 P9.42
SW_PWR_BUT  (via drill 0.5)
  Top 0.254: v129.03,28.7 127.25,30.48 P9.9
  Bottom 0.254: STECKER_BOX.9 144.78,24.13 133.6,24.13 v129.03,28.7
SW_VISION-LED
  Top 0.254: STECKER_BOX.6 139.7,24.13 139.7,26.92 139.19,27.43 133.86,27.43 133.35,27.94 PNP1.C
SW_VISION-LED_3V  (1 unrouted)
  Top 0.254: 134.3,39.05 NPN1.B 133.2,38.1 P9.15
SW_VISION_3V  (via drill 0.5)
  Top 0.254: v129.03,30.48 126.49,33.02 P9.11
  Bottom 0.254: STECKER_BOX.5 139.19,27.18 132.33,27.18 v129.03,30.48